# EAGLE board LilyTiny_PB (EAGLE 6.1)
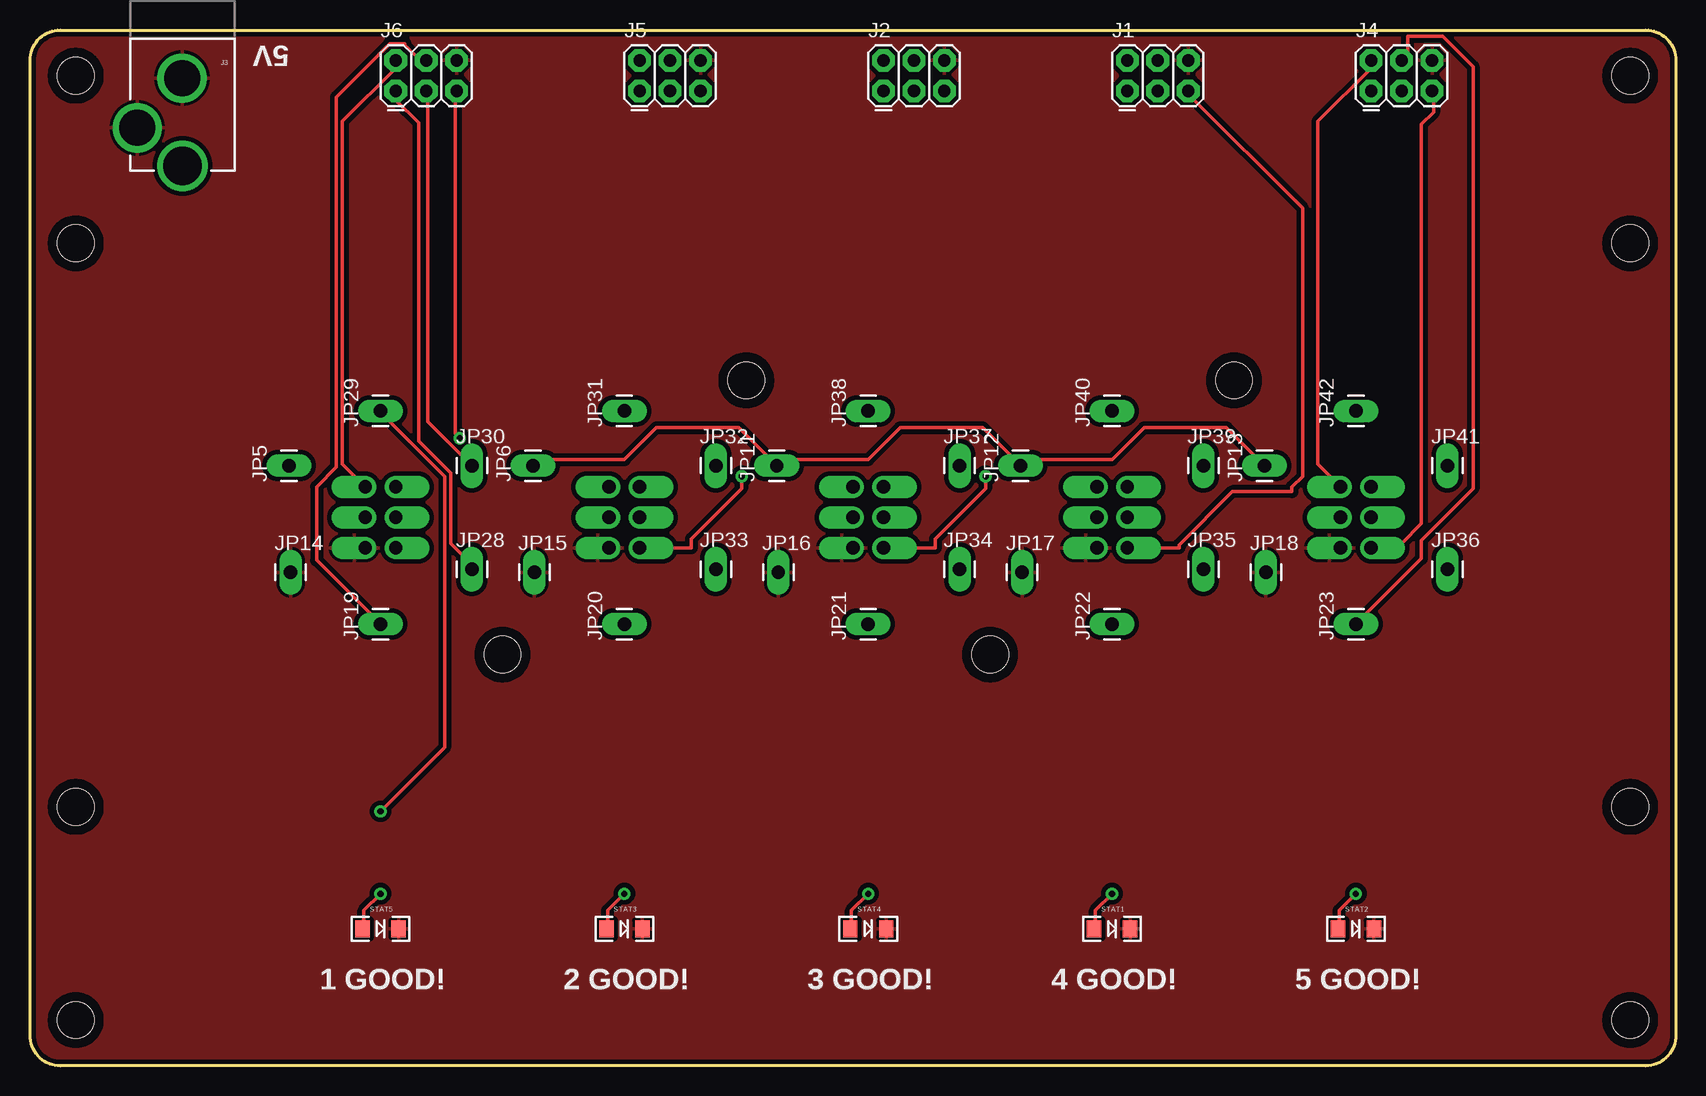
[diagram p0: board, top side]
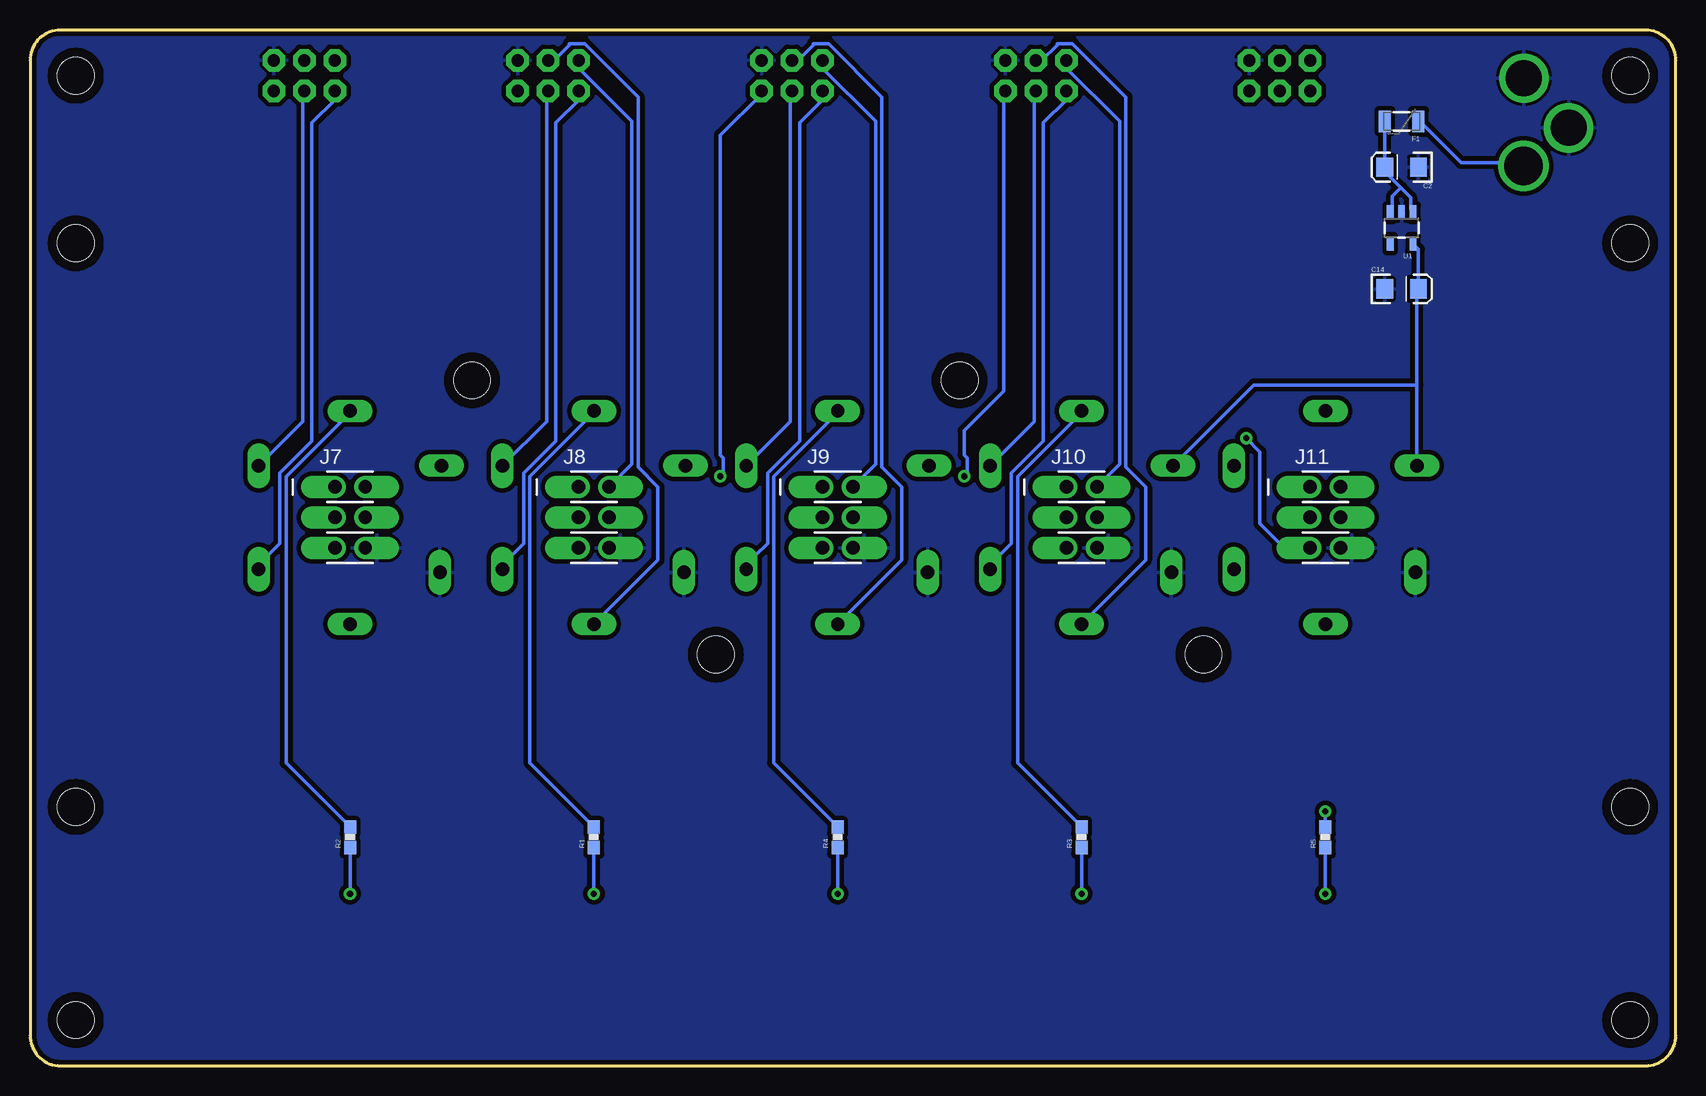
[diagram p1: board, bottom side, seen from below]

Size 137.16 x 86.36 mm. Coordinates in mm from the lower left corner, seen from the top.
Outline: 2.54,0 arc-90 0,2.54 0,83.82 arc-90 2.54,86.36 134.62,86.36 arc-90 137.16,83.82 137.16,2.54 arc-90 134.62,0 2.54,0
Copper layers (1*16): Top 0.035mm / dielectric 1.5mm / Bottom 0.035mm
Design rules: minimum track width 12mil, minimum drill 20mil, track to track 8mil, track to pad 8mil, pad to pad 8mil, via to via 8mil, smd to smd 8mil, copper to edge 8mil, drill to drill 8mil, minimum pad ring 12mil, minimum via ring 10mil, stop-mask expansion 4mil, vias tented up to drill 20mil, thermal gap 10mil

## Footprints (pad centres in the part's own frame; a part is rotated, then mirrored left to right if it is on the bottom)
EIA3216 = smd 1.4 x 1.6: A 1.4,0; C -1.4,0
PTC-1206 = smd 1 x 1.8: 1 -1.4,0; 2 1.4,0
2X3 = drill 1.016 pad 1.88 octagon: 1 0,0; 2 0,2.54; 3 2.54,0; 4 2.54,2.54; 5 5.08,0; 6 5.08,2.54
POWER_JACK_PTH_LOCK = drill 2.997 pad 4.115: GND 0.025,6.557; GNDBREAK 3.762,10.7 | drill 3.2 pad 4.115: PWR 0,13.878
2X3_OFFSET = drill 1.118 pad 1.88 offset: 1 -2.54,-1.27; 2 -2.54,1.27; 3 0,-1.27; 4 0,1.27; 5 2.54,-1.27; 6 2.54,1.27
STAND-OFF-TIGHT = hole 3.048: 0,0
1X01_LONGPAD = drill 1.118 pad 1.88 long: 1 0,0
0603-RES = smd 1.1 x 1: 1 -0.85,0; 2 0.85,0
LED-1206 = smd 1.2 x 1.4: A -1.5,0; C 1.5,0
SOT23-5 = smd 0.55 x 1.2: 1 -0.95,-1.3; 2 0,-1.3; 3 0.95,-1.3; 4 0.95,1.3; 5 -0.95,1.3

## Placement (x,y rotation side)
C2  10uF  [EIA3216]  22.86,74.93 180 bottom
C14  10uF  [EIA3216]  22.86,64.77 0 bottom
F1  PTCSMD  [PTC-1206]  22.86,78.74 180 bottom
J1  AVR_SPI_PRG_6PTH  [2X3]  91.44,81.28 0 top
J2  AVR_SPI_PRG_6PTH  [2X3]  71.12,81.28 0 top
J3  7V  [POWER_JACK_PTH_LOCK]  12.7,88.9 180 top
J4  AVR_SPI_PRG_6PTH  [2X3]  111.76,81.28 0 top
J5  AVR_SPI_PRG_6PTH  [2X3]  50.8,81.28 0 top
J6  AVR_SPI_PRG_6PTH  [2X3]  30.48,81.28 0 top
J7  AVR_SPI_PRG_6OFFSET_PADS  [2X3_OFFSET]  110.49,45.72 270 bottom
J8  AVR_SPI_PRG_6OFFSET_PADS  [2X3_OFFSET]  90.17,45.72 270 bottom
J9  AVR_SPI_PRG_6OFFSET_PADS  [2X3_OFFSET]  69.85,45.72 270 bottom
J10  AVR_SPI_PRG_6OFFSET_PADS  [2X3_OFFSET]  49.53,45.72 270 bottom
J11  AVR_SPI_PRG_6OFFSET_PADS  [2X3_OFFSET]  29.21,45.72 270 bottom
JP1  STAND-OFFTIGHT  [STAND-OFF-TIGHT]  133.35,3.81 0 top
JP2  STAND-OFFTIGHT  [STAND-OFF-TIGHT]  133.35,68.58 0 top
JP3  STAND-OFFTIGHT  [STAND-OFF-TIGHT]  3.81,3.81 0 top
JP4  STAND-OFFTIGHT  [STAND-OFF-TIGHT]  3.81,68.58 0 top
JP5  M01PTH_LONGPAD  [1X01_LONGPAD]  21.59,50.04 90 top
JP6  M01PTH_LONGPAD  [1X01_LONGPAD]  41.91,50.04 90 top
JP7  STAND-OFFTIGHT  [STAND-OFF-TIGHT]  133.35,82.55 0 top
JP8  STAND-OFFTIGHT  [STAND-OFF-TIGHT]  3.81,21.59 0 top
JP9  STAND-OFFTIGHT  [STAND-OFF-TIGHT]  133.35,21.59 0 top
JP10  STAND-OFFTIGHT  [STAND-OFF-TIGHT]  3.81,82.55 0 top
JP11  M01PTH_LONGPAD  [1X01_LONGPAD]  62.23,50.04 90 top
JP12  M01PTH_LONGPAD  [1X01_LONGPAD]  82.55,50.04 90 top
JP13  M01PTH_LONGPAD  [1X01_LONGPAD]  102.87,50.04 90 top
JP14  M01PTH_LONGPAD  [1X01_LONGPAD]  21.72,41.15 0 top
JP15  M01PTH_LONGPAD  [1X01_LONGPAD]  42.04,41.15 0 top
JP16  M01PTH_LONGPAD  [1X01_LONGPAD]  62.36,41.15 0 top
JP17  M01PTH_LONGPAD  [1X01_LONGPAD]  82.68,41.15 0 top
JP18  M01PTH_LONGPAD  [1X01_LONGPAD]  103,41.15 0 top
JP19  M01PTH_LONGPAD  [1X01_LONGPAD]  29.21,36.83 90 top
JP20  M01PTH_LONGPAD  [1X01_LONGPAD]  49.53,36.83 90 top
JP21  M01PTH_LONGPAD  [1X01_LONGPAD]  69.85,36.83 90 top
JP22  M01PTH_LONGPAD  [1X01_LONGPAD]  90.17,36.83 90 top
JP23  M01PTH_LONGPAD  [1X01_LONGPAD]  110.49,36.83 90 top
JP24  STAND-OFFTIGHT  [STAND-OFF-TIGHT]  39.37,34.29 0 top
JP25  STAND-OFFTIGHT  [STAND-OFF-TIGHT]  59.69,57.15 0 top
JP26  STAND-OFFTIGHT  [STAND-OFF-TIGHT]  80.01,34.29 0 top
JP27  STAND-OFFTIGHT  [STAND-OFF-TIGHT]  100.33,57.15 0 top
JP28  M01PTH_LONGPAD  [1X01_LONGPAD]  36.83,41.4 0 top
JP29  M01PTH_LONGPAD  [1X01_LONGPAD]  29.21,54.61 90 top
JP30  M01PTH_LONGPAD  [1X01_LONGPAD]  36.83,50.04 0 top
JP31  M01PTH_LONGPAD  [1X01_LONGPAD]  49.53,54.61 90 top
JP32  M01PTH_LONGPAD  [1X01_LONGPAD]  57.15,50.04 0 top
JP33  M01PTH_LONGPAD  [1X01_LONGPAD]  57.15,41.4 0 top
JP34  M01PTH_LONGPAD  [1X01_LONGPAD]  77.47,41.4 0 top
JP35  M01PTH_LONGPAD  [1X01_LONGPAD]  97.79,41.4 0 top
JP36  M01PTH_LONGPAD  [1X01_LONGPAD]  118.11,41.4 0 top
JP37  M01PTH_LONGPAD  [1X01_LONGPAD]  77.47,50.04 0 top
JP38  M01PTH_LONGPAD  [1X01_LONGPAD]  69.85,54.61 90 top
JP39  M01PTH_LONGPAD  [1X01_LONGPAD]  97.79,50.04 0 top
JP40  M01PTH_LONGPAD  [1X01_LONGPAD]  90.17,54.61 90 top
JP41  M01PTH_LONGPAD  [1X01_LONGPAD]  118.11,50.04 0 top
JP42  M01PTH_LONGPAD  [1X01_LONGPAD]  110.49,54.61 90 top
R1  330  [0603-RES]  90.17,19.05 90 bottom
R2  330  [0603-RES]  110.49,19.05 90 bottom
R3  330  [0603-RES]  49.53,19.05 90 bottom
R4  330  [0603-RES]  69.85,19.05 90 bottom
R5  330  [0603-RES]  29.21,19.05 90 bottom
STAT1  Yellow  [LED-1206]  90.17,11.43 0 top
STAT2  Yellow  [LED-1206]  110.49,11.43 0 top
STAT3  Yellow  [LED-1206]  49.53,11.43 0 top
STAT4  Yellow  [LED-1206]  69.85,11.43 0 top
STAT5  Yellow  [LED-1206]  29.21,11.43 0 top
U1  3.3V  [SOT23-5]  22.86,69.85 180 bottom

## Library data of the parts
C2 C14 F1 J1-J11 JP1-JP4 JP7-JP10 JP24-JP27 R1-R5 STAT1-STAT5 U1 = SparkFun
JP5 JP6 JP11-JP23 JP28-JP42 = Testing

## Nets
A31: JP29.1 R5.2
A32: JP31.1 R3.2
A33: JP38.1 R4.2
A34: JP40.1 R1.2
A35: JP42.1 R2.2
GND: C2.C C14.C J1.6 J2.6 J3.GND J3.GNDBREAK J4.6 J5.6 J6.6 J7.6 J8.6 J9.6 J10.6 J11.6 JP14.1 JP15.1 JP16.1 JP17.1 JP18.1 STAT1.C STAT2.C STAT3.C STAT4.C STAT5.C U1.2
MISO1: J6.1 JP28.1
MISO2: J5.1 JP33.1
MISO3: J2.1 JP34.1
MISO4: J1.1 JP35.1
MISO5: J4.1 JP36.1
MOSI1: J6.4 JP19.1
MOSI2: J5.4 JP20.1
MOSI3: J2.4 JP21.1
MOSI4: J1.4 JP22.1
MOSI5: J4.4 JP23.1
N$1: R1.1 STAT1.A
N$2: R2.1 STAT2.A
N$3: R3.1 STAT3.A
N$4: C2.A F1.2 U1.1 U1.3
N$5: R4.1 STAT4.A
N$6: R5.1 STAT5.A
RAW: F1.1 J3.PWR
RST1: J6.5 J11.5
RST2: J5.5 J10.5
RST3: J2.5 J9.5
RST4: J1.5 J8.5
RST5: J4.5 J7.5
SCK1: J6.3 JP30.1
SCK2: J5.3 JP32.1
SCK3: J2.3 JP37.1
SCK4: J1.3 JP39.1
SCK5: J4.3 JP41.1
VCC: C14.A JP5.1 JP6.1 JP11.1 JP12.1 JP13.1 U1.5
VCC1: J6.2 J11.2
VCC2: J5.2 J10.2
VCC3: J2.2 J9.2
VCC4: J1.2 J8.2
VCC5: J4.2 J7.2

## Tracks (layer width: path | path; a pad name or v marks a point on that pad's centre or on a via)
A31  (via drill 0.51)
  Top 0.305: v29.21,21.21 34.54,26.54 34.54,49.15 29.21,54.48 JP29.1
  Bottom 0.305: v29.21,21.21 R5.2
A32
  Bottom 0.305: JP31.1 49.53,54.48 54.86,49.15 54.86,25.27 49.53,19.94 R3.2
A33
  Bottom 0.305: JP38.1 69.85,54.48 75.18,49.15 75.18,25.27 69.85,19.94 R4.2
A34
  Bottom 0.305: JP40.1 90.17,54.48 95.5,49.15 95.5,25.27 90.17,19.94 R1.2
A35
  Bottom 0.305: JP42.1 110.49,54.48 115.82,49.15 115.82,25.27 110.49,19.94 R2.2
GND
  pour Bottom (isolate 0.381): 0,0 137.16,0 137.16,86.36 0,86.36
  pour Top (isolate 0.381): 0,0 137.16,0 137.16,86.36 0,86.36
MISO1
  Top 0.305: JP28.1 36.07,42.16 36.07,42.55 35.05,43.56 35.05,49.4 32.38,52.07 32.38,78.61 30.48,80.52 J6.1
MISO2
  Bottom 0.305: JP33.1 56.39,42.16 56.39,42.55 55.37,43.56 55.37,49.4 52.7,52.07 52.7,78.61 50.8,80.52 J5.1
MISO3
  Bottom 0.305: JP34.1 76.71,42.16 76.71,42.55 75.69,43.56 75.69,49.4 73.03,52.07 73.03,78.61 71.12,80.52 J2.1
MISO4
  Bottom 0.305: JP35.1 97.03,42.16 97.03,42.55 96.01,43.56 96.01,49.4 93.34,52.07 93.34,78.61 91.44,80.52 J1.1
MISO5
  Bottom 0.305: JP36.1 117.35,42.16 117.35,42.55 116.33,43.56 116.33,49.4 113.67,52.07 113.67,78.61 111.76,80.52 J4.1
MOSI1
  Top 0.305: JP19.1 23.88,42.16 23.88,48.26 25.53,49.91 25.53,80.77 29.97,85.22 31.24,85.22 31.24,85.09 32.51,83.82 J6.4
MOSI2
  Bottom 0.305: JP20.1 44.2,42.16 44.2,48.26 45.85,49.91 45.85,80.77 50.29,85.22 51.56,85.22 51.56,85.09 52.83,83.82 J5.4
MOSI3
  Bottom 0.305: JP21.1 64.52,42.16 64.52,48.26 66.17,49.91 66.17,80.77 70.61,85.22 71.88,85.22 71.88,85.09 73.15,83.82 J2.4
MOSI4
  Bottom 0.305: JP22.1 84.84,42.16 84.84,48.26 86.49,49.91 86.49,80.77 90.93,85.22 92.2,85.22 92.2,85.09 93.47,83.82 J1.4
MOSI5
  Top 0.305: JP23.1 115.95,42.29 115.95,43.81 120.27,48.13 120.27,83.31 117.73,85.85 114.81,85.85 114.81,84.58 114.3,84.07 J4.4
N$1  (via drill 0.51)
  Top 0.305: v90.17,14.35 88.77,12.95 88.77,11.43 STAT1.A
  Bottom 0.305: v90.17,14.35 R1.1
N$2  (via drill 0.51)
  Top 0.305: v110.49,14.35 109.09,12.95 109.09,11.43 STAT2.A
  Bottom 0.305: v110.49,14.35 R2.1
N$3  (via drill 0.51)
  Top 0.305: v49.53,14.35 48.13,12.95 48.13,11.43 STAT3.A
  Bottom 0.305: v49.53,14.35 R3.1
N$4
  Bottom 0.305: 22.92,73.22 24.26,74.55 C2.A 24.26,75.06 F1.2 | 22.92,73.22 22.1,72.39 22.1,71.37 21.97,71.25 U1.1 | 22.92,73.22 23.62,72.52 23.62,71.37 23.75,71.25 U1.3
N$5  (via drill 0.51)
  Top 0.305: v69.85,14.35 68.45,12.95 68.45,11.43 STAT4.A
  Bottom 0.305: v69.85,14.35 R4.1
N$6  (via drill 0.51)
  Top 0.305: v29.21,14.35 27.81,12.95 27.81,11.43 STAT5.A
  Bottom 0.305: v29.21,14.35 R5.1
RAW
  Bottom 0.305: J3.PWR 12.7,75.31 17.91,75.31 21.34,78.74 F1.1
RST1  (via drill 0.51)
  Top 0.305: v35.81,52.32 35.43,52.7 35.43,81.15 J6.5
  Bottom 0.305: J11.5 33.02,43.18 33.02,43.56 34.67,45.21 34.67,51.18 v35.81,52.32
RST2  (via drill 0.51)
  Top 0.305: J10.5 55.12,43.18 55.12,43.94 59.31,48.13 v59.31,49.15
  Bottom 0.305: v59.31,49.15 59.05,49.4 59.05,50.67 59.31,50.93 59.31,52.96 56.01,56.26 56.01,81.15 J5.5
RST3  (via drill 0.51)
  Top 0.305: J9.5 75.44,43.18 75.44,43.94 79.63,48.13 v79.63,49.15
  Bottom 0.305: v79.63,49.15 79.38,49.4 79.38,50.67 79.63,50.93 79.63,77.6 76.2,81.03 J2.5
RST4
  Top 0.305: J8.5 95.76,43.18 95.76,43.43 100.2,47.88 105.16,47.88 105.16,48.26 106.05,49.15 106.05,71.5 96.52,81.03 J1.5
RST5
  Top 0.305: J7.5 114.3,43.18 114.3,43.56 115.95,45.21 115.95,78.49 116.97,79.5 116.97,81.15 J4.5
SCK1
  Top 0.305: JP30.1 33.15,53.72 33.15,81.15 J6.3
SCK2
  Bottom 0.305: JP32.1 53.47,53.72 53.47,81.15 J5.3
SCK3
  Bottom 0.305: JP37.1 73.79,53.72 73.79,81.15 J2.3
SCK4
  Bottom 0.305: JP39.1 94.11,53.72 94.11,81.15 J1.3
SCK5
  Bottom 0.305: JP41.1 114.43,53.72 114.43,81.15 J4.3
VCC
  Top 0.305: JP6.1 41.91,50.55 49.53,50.55 52.2,53.21 59.05,53.21 JP11.1 61.85,50.55 69.85,50.55 72.52,53.21 79.38,53.21 JP12.1 82.17,50.55 90.17,50.55 92.84,53.21 99.69,53.21 JP13.1
  Bottom 0.305: U1.5 21.84,68.45 21.46,68.07 C14.A 21.46,64.64 21.59,64.52 21.59,56.77 | JP5.1 21.59,56.77 | JP6.1 35.18,56.77 21.59,56.77
VCC1
  Top 0.305: J11.2 26.04,50.16 26.04,78.74 30.48,83.19 J6.2
VCC2
  Bottom 0.305: J10.2 46.35,50.16 46.35,78.74 50.8,83.19 J5.2
VCC3
  Bottom 0.305: J9.2 66.67,50.16 66.67,78.74 71.12,83.19 J2.2
VCC4
  Bottom 0.305: J8.2 87,50.16 87,78.74 91.44,83.19 J1.2
VCC5
  Top 0.305: J7.2 107.31,50.16 107.31,78.74 111.76,83.19 J4.2

## Text on the board
tPlace: 5V | 1 GOOD! | 2 GOOD! | 3 GOOD! | 4 GOOD! | 5 GOOD!
Reference: 3 | 3 | 3 | 3 | 3 | 3 | 3 | 3 | 3 | 3 | 3 | 3 | 3 | 3 | 3 | 3 | 3 | 3 | 3 | 3 | 3 | 3 | 3 | 3 | 3 | + | + | + | + | + | + | + | + | + | + | + | + | + | + | + | + | + | + | + | + | + | + | + | + | + | 2 | 2 | 2 | 2 | 2 | 2 | 2 | 2 | 2 | 2 | 2 | 2 | 2 | 2 | 2 | 2 | 2 | 2 | 2 | 2 | 2 | 2 | 2 | 2 | 2 | - | - | - | - | - | - | - | - | - | - | - | - | - | - | - | - | - | - | - | - | - | - | - | - | - | 1 | 1 | 1 | 1 | 1 | 1 | 1 | 1 | 1 | 1 | 1 | 1 | 1 | 1 | 1 | 1 | 1 | 1 | 1 | 1 | 1 | 1 | 1 | 1 | 1 | 1 | 1 | 1 | 1 | 1 | 0 | 0 | 0 | 0 | 0 | 0 | 0 | 0 | 0 | 0 | 0 | 0 | 0 | 0 | 0 | 0 | 0 | 0 | 0 | 0 | 0 | 0 | 0 | 0 | 0